# Altium PCB KAVE_F2.PcbDoc
Units mm, origin at the board's own origin, x right, y up, seen from the top; angles counter-clockwise.
Board outline 46.33 x 77.19 mm, 2 copper layers (Top Layer, Bottom Layer); 36 components, 17 nets, 89 pads, 134 vias.
Unrouted connection lines stored in the file: 5.
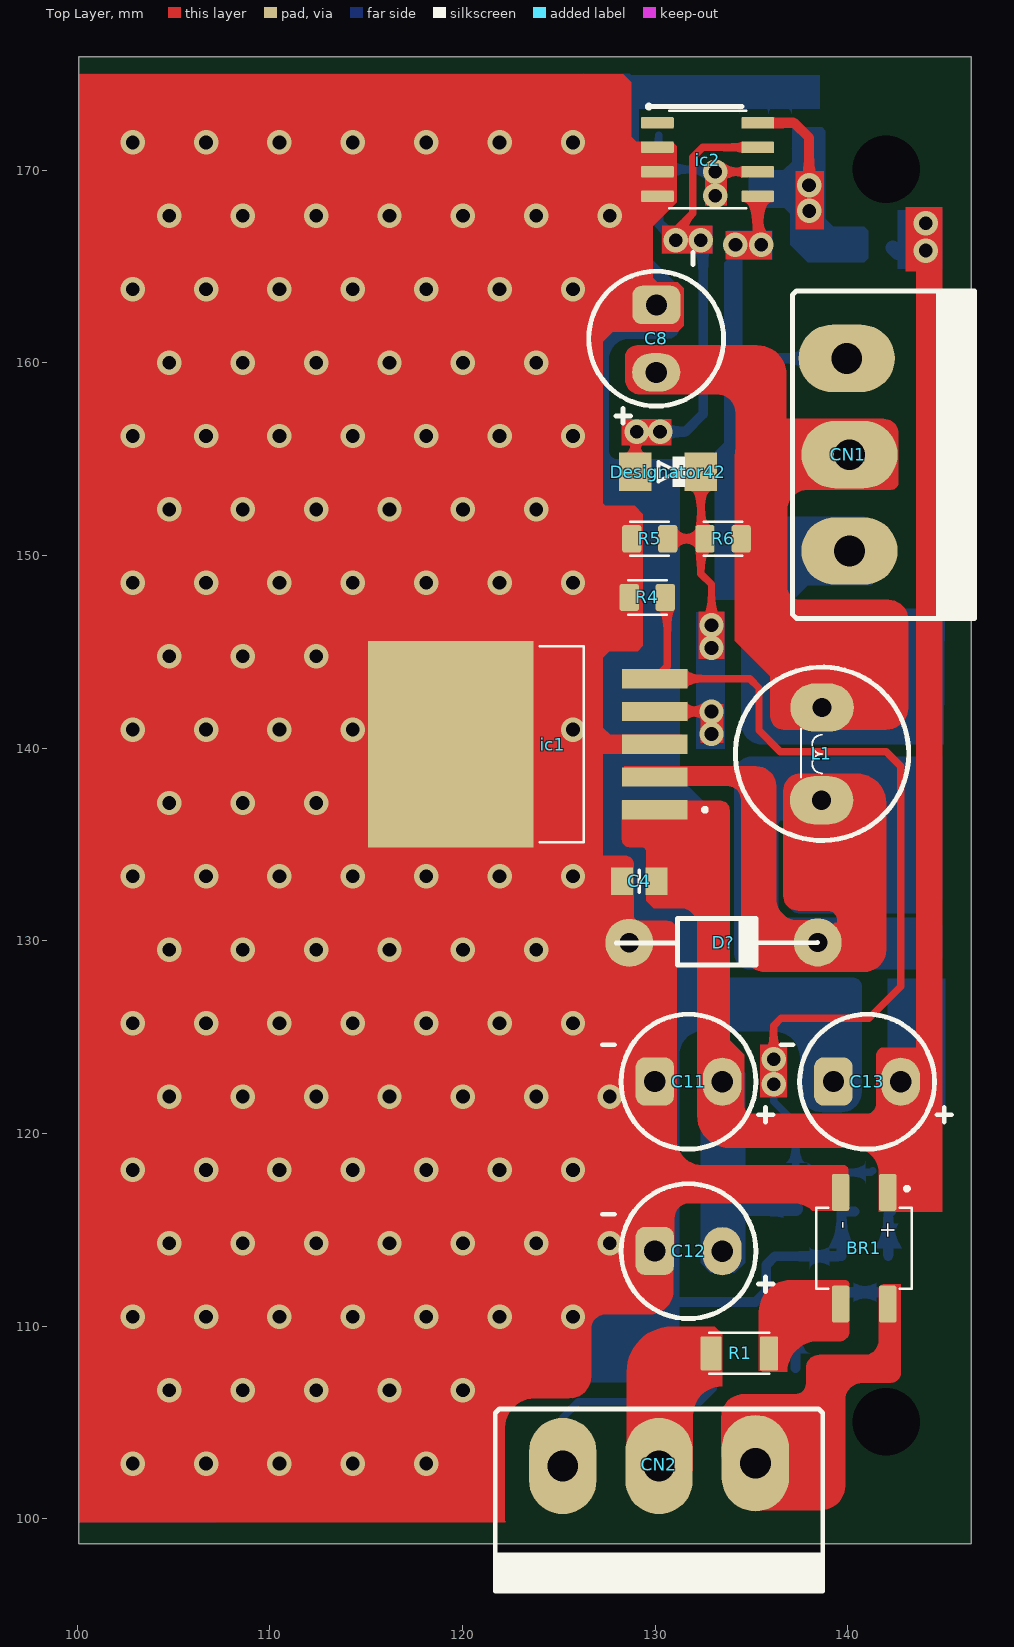
[diagram p0: Top Layer view]
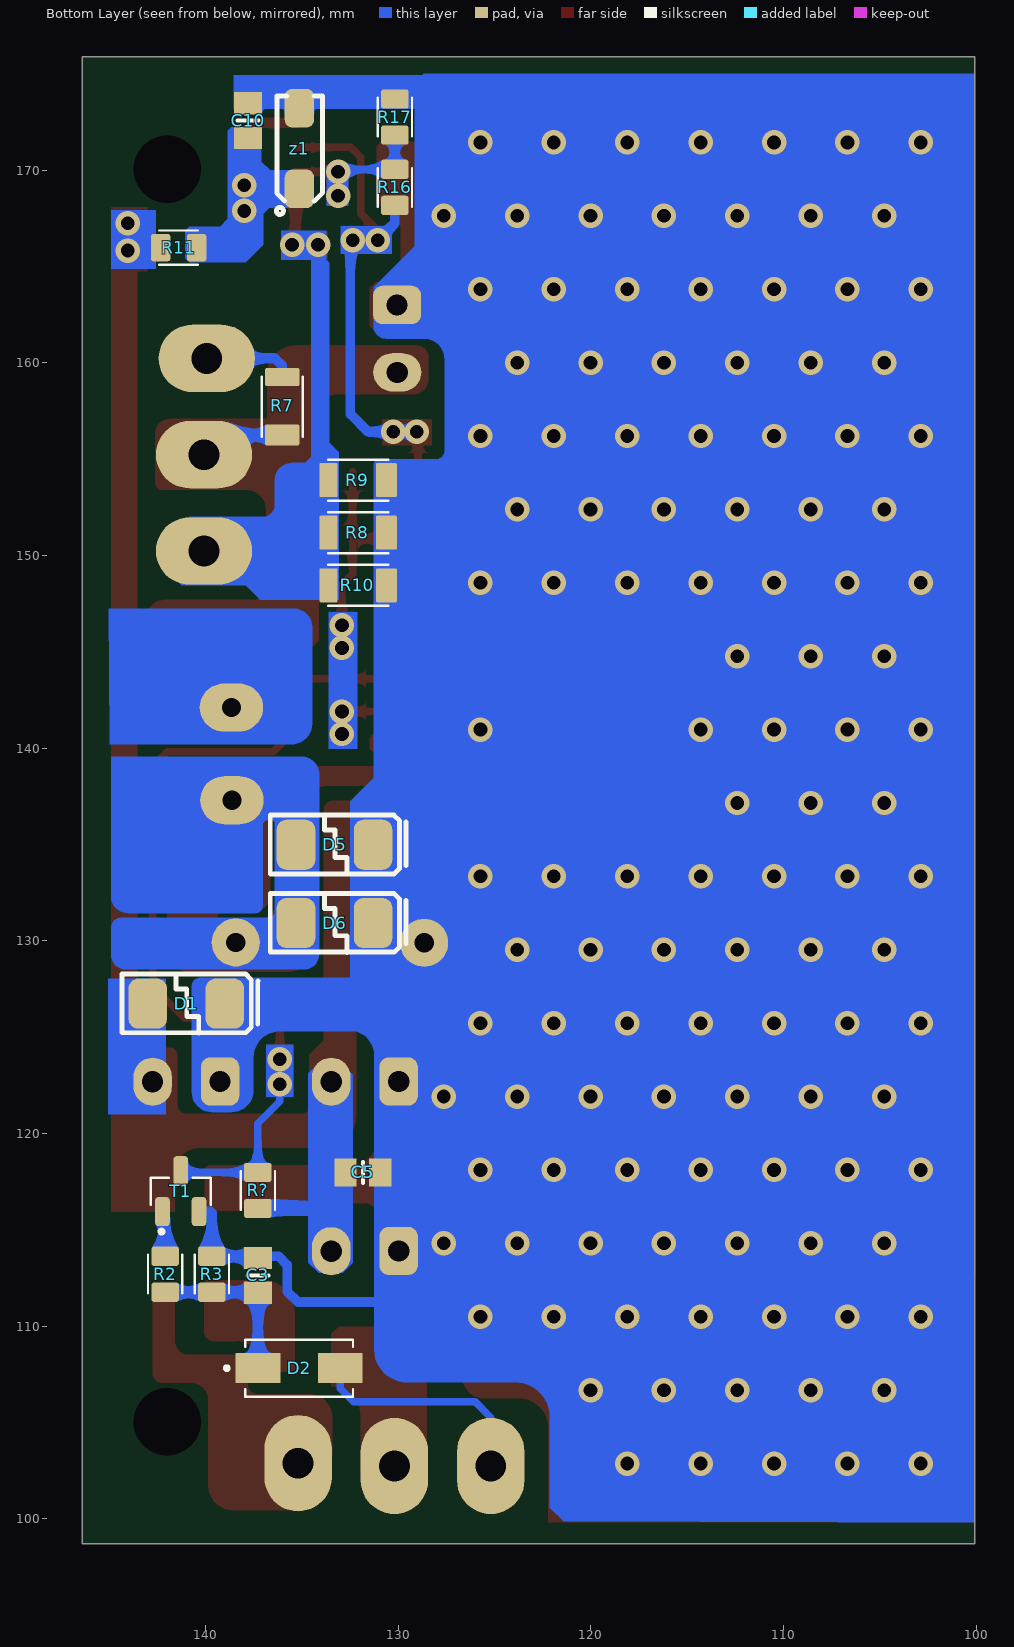
[diagram p1: Bottom Layer view, seen from below]
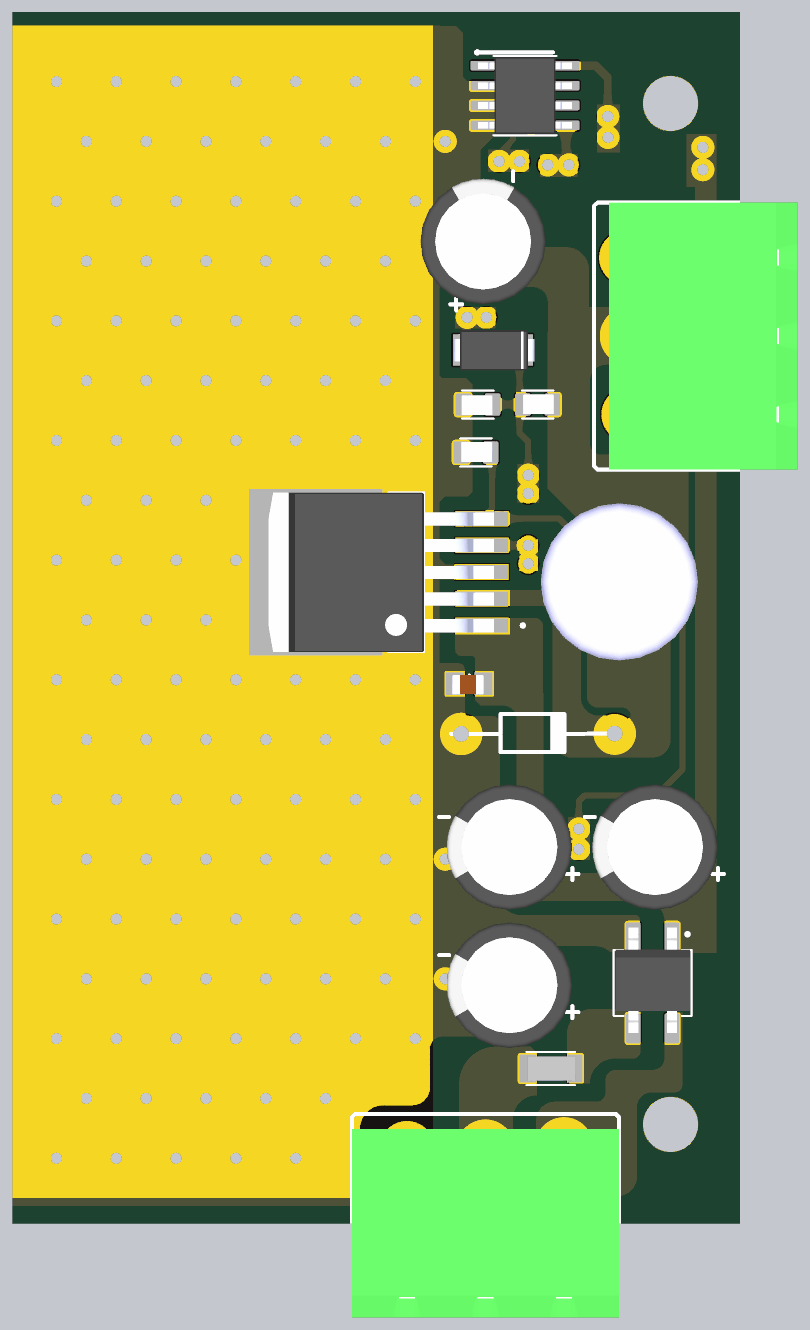
[diagram p2: 3D render of the assembled board from above, using the file's embedded part models]
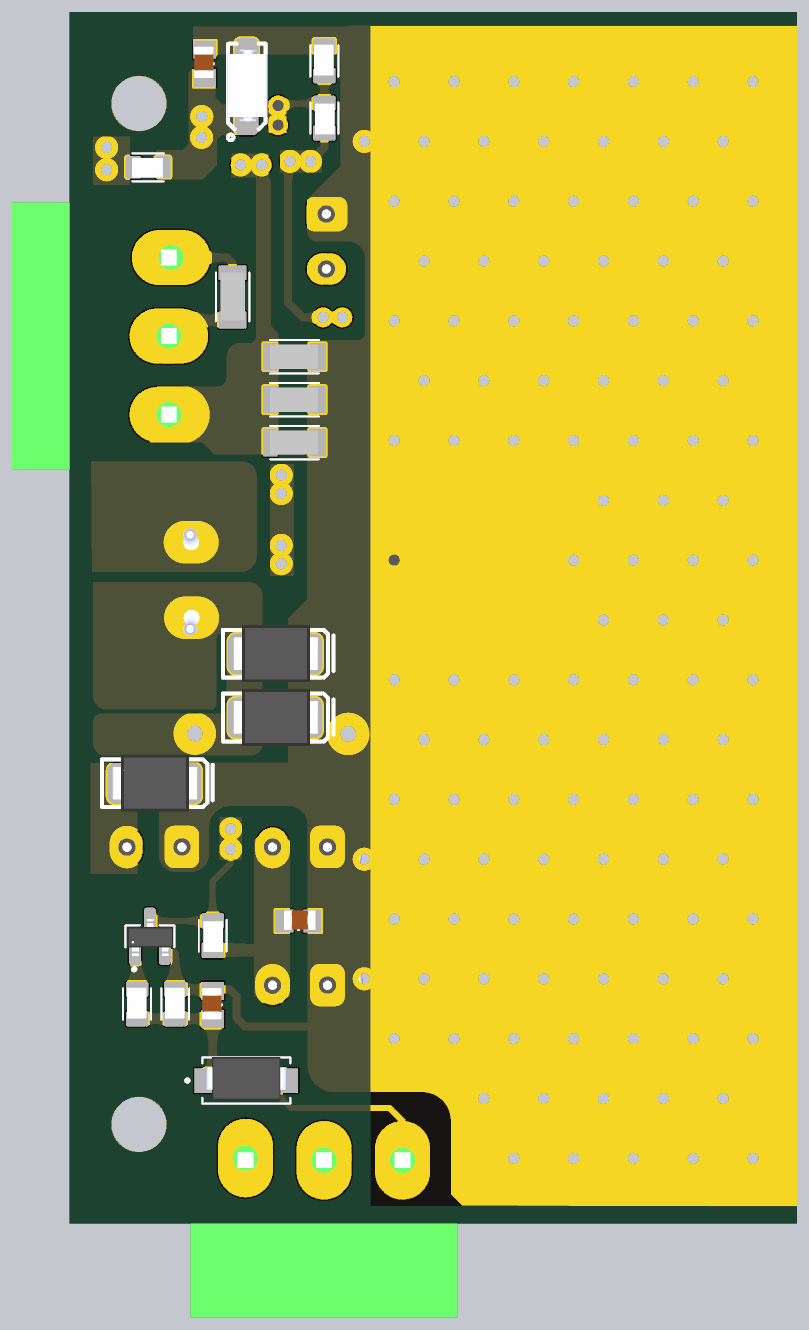
[diagram p3: 3D render of the assembled board from below, using the file's embedded part models]

## Layer stack, top to bottom
Top Solder: solder mask 0.0102, Solder Resist, Dk 3.5
Top Layer: signal copper 0.0356
Dielectric 1: dielectric 0.32, FR-4, Dk 4.8
Bottom Layer: signal copper 0.0356
Bottom Solder: solder mask 0.0102, Solder Resist, Dk 3.5

## Board outline
100.076,98.704 100.076,175.895 146.406,175.895 146.406,98.704

## Design rules (kind name [scope] priority, off if disabled: settings)
Clearance POLY [InNamedPolygon('PG')] p1: gap=1.27 ignorepadtopadclearanceinfootprint=FALSE
Clearance Clearance_1 [All] p2: gap=0.254 ignorepadtopadclearanceinfootprint=FALSE except(0: Arc-Hole Track-Hole SMDPad-Hole THPad-Hole Via-Hole Fill-Hole Poly-Hole Region-Hole Text-Hole)
ComponentClearance [All] p1: gap=0 collisioncheckmode=3 verticalgap=0 showdistances=FALSE
PolygonConnect [All] p1: connectstyle=Direct reliefconductorwidth=0.254 reliefentries=4 polygonreliefangle="90 Angle" airgapwidth=0.254
RoutingVias [All] p1: holewidth=0.711 width=1.27 viastyle="Through Hole" minholewidth=0.711 minwidth=1.27 maxholewidth=0.711 maxwidth=1.27
SolderMaskExpansion [All] p1: expansion=0.102
Width [All] p1: maxlimit=5 minlimit=0.254 preferedwidth=0.254 minimp=50.000000 maximp=50.000000 favimp=50.000000
29 further rules are at their usual default settings.

## Classes and differential pairs
component class U_LED_EN_Kian_V2_SWITCHING: BR1 C3 C4 C5 C8 C10 D1 D2 D? ic1 ic2 L1 R1 R2 R3 R4 R5 R6 R7 R8 R9 R16 R17 R? T1 z1
component class U_LED_EN_Kian_V2_CONECTOR: CN1 CN2

## Components (designator, comment, footprint, x,y, rotation, side; value= is the part's Value field where it differs from the comment)
BR1 "mb6s" MB6S/SMD 140.208,114.046 r90 top
C3 "1UF" CAP-0805 137.265,113.563 r270 bottom
C4 "100nF" CAP-0805 128.245,133.118 r0 top
C5 "100nF" CAP-0805 130.906,117.961 r0 bottom
C8 "1000uF-10V" CAP-EL-P3.5MM 130.048,163.012 r270 top
C10 "100nF" CAP-0805 137.773,173.507 r270 bottom
C11 "1000uF-10V" CAP-EL-P3.5MM 129.977,122.692 r0 top (schematic designator C8)
C12 "1000uF-10V" CAP-EL-P3.5MM 129.977,113.894 r0 top (schematic designator C8)
C13 "1000uF-10V" CAP-EL-P3.5MM 139.248,122.692 r0 top (schematic designator C8)
CN1 "LED_OUT" CONECTOR/FONIX/3PIN 140.081,150.241 r90 top
CN2 "INPUT-24-S" CONECTOR/FONIX/3PIN 125.196,102.743 r0 top
D1 "40V" TVS-5V-SMD 143.002,126.746 r180 bottom
D2 "M7" DIOD/1N4007/SMD 137.306,107.823 r180 bottom
D5 "40V" TVS-5V-SMD 135.306,134.993 r180 bottom (schematic designator D1)
D6 "40V" TVS-5V-SMD 135.306,130.929 r180 bottom (schematic designator D1)
D? "1N5822" DIOD/1N4007/DIP 138.455,129.9 r180 top
Designator42 "Comment" mini_melf 130.521,154.305 r180 top
ic1 "lm2576" lm2576 123.695,141.351 r180 top
ic2 "LM358" SOP-8 133.096,170.434 r0 top
L1 "100uH" inductor-9*12 138.634,137.313 r90 top
R1 "1.1R" RES/1206 134.366,108.458 r0 top
R2 "4.7K" RES/0805 143.033,113.746 r270 bottom
R3 "100K" RES/0805 140.607,113.746 r270 bottom
R4 "10K" RES/0805 130.634,148.761 r180 top
R5 "10K" RES/0805 128.665,149.943 r0 top
R6 "10K" RES/0805 134.571,151.809 r180 top
R7 "18R" RES/1206 135.89,157.734 r90 bottom
R8 "0.2R" RES/1206 132.08,151.322 r0 bottom
R9 "0.2R" RES/1206 132.08,154.055 r0 bottom
R10 "0.2R" RES/1206 132.08,148.59 r0 bottom (schematic designator R8)
R11 "10K" RES/0805 142.445,165.056 r180 bottom (schematic designator R5)
R16 "10K" RES/0805 129.242,168.07 r90 bottom
R17 "2.2k" RES/0805 131.108,173.814 r270 bottom
R? "10K" RES/0805 136.354,116 r90 bottom
T1 "NPN" SOT23 142.24,115.945 r90 bottom
z1 "12v" DIOD/RS1J 135.234,171.215 r90 bottom

## Footprints (in the part's own frame and the unit in brackets; to place one, negate y for a bottom-side part, rotate by r counter-clockwise, add the part's x,y. Pads: shape width x height; smd on the part's side, far side on the other; paste and mask are expansions set on the pad)
CAP-0805 [mm]
  rect 1.15x1.45 smd: 1(0.025,-0.022) 2(1.825,-0.022)
  silkscreen extent 0.93,-0.57 0.93,0.53, body extent -0.17,-0.71 1.84,0.54, height 0.94
CAP-EL-P3.5MM [mm]
  oval 2x2.5 hole 1.1: +(3.5,0)
  rrect50% 2x2.5 hole 1.1: -(0,0.01)
  silkscreen extent -2.73,-3.5 6.13,3.5, body extent -2.25,-4 5.75,4, height 11.5
CONECTOR/FONIX/3PIN [mm]
  oval 3.5x5 hole 1.6: 1(0,0) 2(5,0) 3(10,0.144)
  silkscreen extent -3.5,-6.5 13.5,2.96, body extent -3.5,-10 13.5,2, height 8.8
DIOD/1N4007/DIP [mm]
  round 2.5 hole 1: A(9.8,0) K(0.025,-0.021)
  silkscreen extent 0.02,-1.26 10.46,1.15
DIOD/1N4007/SMD [mm]
  rect 2.33x1.56 smd: A(4.299,0) K(0.019,0)
  silkscreen extent -1.7,-1.48 4.96,1.48, body extent -0.44,-1.24 4.76,1.49, height 2.6
DIOD/RS1J [mm]
  rrect50% 2x1.524 smd: A(2.013,-0.106) K(-2.178,-0.106)
  silkscreen extent -3.5,-1.31 2.65,1.09, body extent -2.32,-1.44 2.28,1.16, height 2.1
inductor-9*12 [mm]
  oval 2.5x3.3 hole 1: 1(-0.01,0) 2(4.8,-0.025)
  silkscreen extent -2.1,-4.53 6.9,4.47, body extent -2.73,-5.09 7.27,4.91, height 12
lm2576 [mm]
  rect 3.4x1 smd paste-3 mask+0: 1(-6.282,4.543) 2(-6.282,2.843) 3(-6.282,1.143) 4(-6.282,-0.557) 5(-6.282,-2.257)
  rect 8.6x10.7 smd paste-6 mask+0: 6(4.318,1.143)
  silkscreen extent -8.98,-3.94 -0.3,6.22, body extent -7.04,-3.92 7.31,6.24, height 4.65
MB6S/SMD [mm]
  rrect23% 1.91x0.91 smd: +(2.9,-1.86) -(2.9,0.59) F(-2.9,0.59) N(-2.9,-1.86)
  silkscreen extent -2.1,-3.12 3.2,1.85, body extent -3.19,-3 3.51,1.72, height 2.9
mini_melf [mm]
  rect 1.7x2 smd: A(1.557,-0.049) K(-1.843,-0.049)
  silkscreen extent -1.01,-0.84 0.36,0.74, body extent -2.79,-1.31 2.35,1.25, height 2.5
RES/0805 [mm]
  rrect25% 1x1.42 smd: 1(0.113,0.933) 2(1.983,0.933)
  silkscreen extent 0.05,0.04 2.05,1.82, body extent 0,0.28 2,1.53, height 0.6
RES/1206 [mm]
  rrect14% 1.09x1.77 smd: 1(-1.469,0.131)
  rrect14% 0.94x1.77 smd: 2(1.536,0.131)
  silkscreen extent -1.55,-0.93 1.55,1.2, body extent -1.51,-0.64 1.59,0.91, height 0.55
SOP-8 [mm]
  rrect25% 1.71x0.61 smd: 1(-2.986,2.032) 2(-2.986,0.762) 3(-2.986,-0.508) 4(-2.986,-1.778) 5(2.224,-1.778) 6(2.224,-0.508) 7(2.224,0.762) 8(2.224,2.032)
  silkscreen extent -3.53,-2.4 1.62,2.98, body extent -3.38,-2.32 2.62,2.58, height 1.75
SOT23 [mil]
  rrect50% 60x30 smd: 1(0.24,0) 2(0.24,-74.8) 3(83.7,-37.4)
  silkscreen extent -45,-99 70,24, body extent -7,-96 86,19, height 44
TVS-5V-SMD [mm]
  rrect50% 2x2.6 smd: 1(4,0) 2(0,0)
  silkscreen extent -1.33,-1.53 5.72,1.54, body extent -0.66,-1.79 4.74,1.83, height 2.43

## Part data
BR1: library part "BRIDGE RECTIFIERS/SMD"
C3 C4 C5 C10: library part cap_smd
C8 C11 C12 C13: library part cap-electrolit
CN1 CN2: library part CONECTOR/FONIX/3PIN
D1 D5 D6: library part TVS-SMD
D2 D?: library part DIOD/RECTIFIERS
L1: library part inductor
R1 R2 R3 R4 R5 R6 R7 R8 R9 R10 R11 R16 R17 R?: library part RES/SMD
z1: library part zener-0.5w

## Free pads (board coordinates)
  round 1.524 hole 3.5: 13(141.986,105.029) 13(141.986,170.053)

## Via types
v1: diameter 1.27, hole 0.711, Top Layer to Bottom Layer, 134 vias

## Nets (pads, with @x,y where several pads share a name; then routed paths per layer and width w, separated by ;. In a path a pad name is that pad's centre, name@x,y a point inside that pad or via, vN(x,y) a via of type N, cw(c..) or ccw(c..) an arc to the next point about the centre after c; other vN are vias at no path point)
+12: C10.2 ic2.8 R11.2 z1.K | length 15.6
  Top Layer w0.508: ic2.8 137.215,172.466 137.986,171.696 v1(137.986,169.227)
  Bottom Layer w0.508: z1.K 137.287,169.037 ; C10.2 137.795,166.624 138.43,165.989 R11.2
  other v1: 137.998,167.894
+24: BR1.+ C4.2 C5.2 C11.+ C12.+ C13.+ D1.2 ic1.1 R11.1 R?.1 | length 58.2
  Top Layer w0.762: C13.+ 144.145,124.089 144.145,165.735 v1(144.043,165.837)
  Bottom Layer w0.762: C11.+@133.477,122.682 133.604,122.555 133.604,116.205 ; C12.+@133.604,114.046 133.604,116.205 ; R?.1 133.696,116.113 133.604,116.205 ; R11.1 142.586,165.735 142.688,165.837 v1(144.043,165.837) ; C13.+ C13.+@142.875,122.819
  other v1: 144.043,167.259
+LED_G: CN1.3 R7.2 | length 4.7
  Bottom Layer w0.508: R7.2 136.021,159.871 136.39,160.241 CN1.3
+LED_OUT: C8.+ CN1.2 L1.2 R6.1 R7.1 | length 4.5
  Bottom Layer w0.508: R7.1 139.057,156.265 CN1.2
-LED_OUT: CN1.1 ic2.5 R8.2 R9.2 R10.2 | length 15
  Top Layer w0.508: ic2.5 135.32,166.257 135.436,166.141 v1(135.509,166.141)
  Bottom Layer w0.508: R9.2 134.163,154.47 v1@134.163,166.091
  other v1: 134.163,166.141
AC1: CN2.2 R1.1
AC2: BR1.N CN2.3
EN: ic1.5 R4.1 R?.2 T1.3 | length 51.4
  Top Layer w0.381: R4.1@130.626,147.828 130.626,144.257 ic1.5 134.903,143.608 135.382,143.129 135.382,140.931 136.486,139.827 141.986,139.827 142.748,139.065 142.748,127.635 141.097,125.984 136.525,125.984 136.144,125.603 v1(136.144,122.555)
  Bottom Layer w0.381: v1(136.144,122.555) 136.144,121.666 137.287,120.523 R?.2 141.202,117.983 T1.3
  other v1: 136.144,123.85
GND: BR1.- C3.1 C4.1 C5.1 C8.- C10.1 C11.- C12.- C13.- D1.1 D5.1 D6.1 D?.A ic1.3 ic1.6 ic2.2 ic2.3 ic2.4 R3.1 R4.2 R5.1 R8.1 R9.1 R10.1 R17.1 T1.2 z1.A | length 40.5
  Top Layer w0.508: 125.603,140.208 ic1.3 ; 125.73,147.828 R4.2 128.778,147.955 R5.1
  Bottom Layer w0.508: C12.-@129.977,114.386 129.977,112.263 130.988,111.252 135.204,111.252 135.763,111.811 135.763,113.182 136.214,113.633 R3.1 139.673,115.874 139.751,115.951 T1.2 ; R17.1 137.576,173.701 C10.1 ; R10.1 R8.1 R9.1
  other v1: 102.87,102.87 106.68,102.87 110.49,102.87 114.3,102.87 118.11,102.87 104.775,106.68 108.585,106.68 112.395,106.68 116.205,106.68 120.015,106.68 102.87,110.49 106.68,110.49 110.49,110.49 114.3,110.49 118.11,110.49 121.92,110.49 125.73,110.49 104.775,114.3 108.585,114.3 112.395,114.3 116.205,114.3 120.015,114.3 123.825,114.3 127.635,114.3 102.87,118.11 106.68,118.11 110.49,118.11 114.3,118.11 118.11,118.11 121.92,118.11 125.73,118.11 104.775,121.92 108.585,121.92 112.395,121.92 116.205,121.92 120.015,121.92 123.825,121.92 127.635,121.92 102.87,125.73 106.68,125.73 110.49,125.73 114.3,125.73 118.11,125.73 121.92,125.73 125.73,125.73 104.775,129.54 108.585,129.54 112.395,129.54 116.205,129.54 120.015,129.54 123.825,129.54 102.87,133.35 106.68,133.35 110.49,133.35 114.3,133.35 118.11,133.35 121.92,133.35 125.73,133.35 104.775,137.16 108.585,137.16 112.395,137.16 102.87,140.97 106.68,140.97 110.49,140.97 114.3,140.97 125.73,140.97 104.775,144.78 108.585,144.78 112.395,144.78 102.87,148.59 106.68,148.59 110.49,148.59 114.3,148.59 118.11,148.59 121.92,148.59 125.73,148.59 104.775,152.4 108.585,152.4 112.395,152.4 116.205,152.4 120.015,152.4 123.825,152.4 102.87,156.21 106.68,156.21 110.49,156.21 114.3,156.21 118.11,156.21 121.92,156.21 125.73,156.21 104.775,160.02 108.585,160.02 112.395,160.02 116.205,160.02 120.015,160.02 123.825,160.02 102.87,163.83 106.68,163.83 110.49,163.83 114.3,163.83 118.11,163.83 121.92,163.83 125.73,163.83 104.775,167.64 108.585,167.64 112.395,167.64 116.205,167.64 120.015,167.64 123.825,167.64 127.635,167.64 102.87,171.45 106.68,171.45 110.49,171.45 114.3,171.45 118.11,171.45 121.92,171.45 125.73,171.45
Ic_fb: Designator42.K ic1.4 R5.2 R6.2 | length 17.3
  Top Layer w0.381: ic1.4 v1(132.92,141.908) ; R5.2 R6.2@132.364,150.876 ; Designator42.K R6.2@132.364,150.876 ; v1(132.92,145.21) 132.92,148.512 132.364,149.068 R6.2@132.364,150.876
  Bottom Layer w0.381: v1(132.92,141.908) v1(132.92,145.21)
  other v1: 132.92,140.741 132.92,146.38
IF: Designator42.A ic2.7 R16.1 | length 26.2
  Top Layer w0.381: Designator42.A 128.964,156.364 v1(129.032,156.432) ; v1(131.064,166.37) 131.064,166.878 131.953,167.767 131.953,170.688 132.461,171.196 ic2.7
  Bottom Layer w0.508: v1(129.032,156.432) 131.566,156.432 132.486,157.353 132.486,166.04 v1@131.369,166.04 ; R16.1 130.175,167.259 v1(131.064,166.37)
  other v1: 130.251,156.432 132.364,166.37
NetBR1_F: BR1.F R1.2
NetC3_2: C3.2 D2.K R2.2 R3.2 | length 8.7
  Bottom Layer w0.508: D2.K C3.2 137.312,111.763 R3.2 R2.2
NetD3_K: D5.2 D6.2 D?.K ic1.2 L1.1 | length 6.6
  Top Layer w0.762: L1.1@138.262,137.033 138.43,137.201 L1.1@138.659,137.43 ; D?.K@138.43,129.413 D?.K@138.43,130.683
  Bottom Layer w0.762: D6.2@135.255,130.937 135.382,131.064 D5.2@135.382,135.001 ; L1.1@138.659,136.754 L1.1@138.659,137.43
Netic2_6: ic2.6 R16.2 R17.2 | length 7.2
  Top Layer w0.381: v1(133.121,169.926) ic2.6
  Bottom Layer w0.381: R17.2 R16.2 133.223,170.053 133.121,169.951 v1(133.121,169.926)
  other v1: 133.121,168.681
NetR2_1: R2.1 T1.1 | length 2.4
  Bottom Layer w0.508: R2.1 142.1,115.811 T1.1
SIGNAL: CN2.1 D2.A | length 12
  Bottom Layer w0.381: CN2.1 125.196,105.257 126.009,106.07 132.309,106.07 133.007,106.769 D2.A
pads on no net: ic2.1

## Other copper
Top Layer:
  rectangle net +24: 132.182,121.463 133.883,132.486
  rectangle net EN: 135.445,121.869 136.852,124.612
  rectangle net IF: 128.245,155.727 130.835,157.099
  rectangle net Ic_fb: 132.356,140.267 133.544,142.289
  rectangle net Ic_fb: 132.232,144.628 133.604,147.091
  rectangle net IF: 130.353,165.684 132.969,167.132
  rectangle net -LED_OUT: 133.656,165.379 136.068,166.853
  rectangle net Netic2_6: 132.588,168.173 133.731,170.284
  rectangle net +12: 137.287,166.929 138.76,169.977
  rectangle net +24: 143.002,164.744 144.907,168.097
  rectangle net +24: 143.535,123.952 144.907,168.097
  rectangle net GND: 100.025,112.497 127.279,175.006
  region net AC2: 133.426,103.2 133.426,105.283 cw(c134.62,105.283) 134.62,106.477 137.287,106.477 ccw(c137.287,107.018) 137.828,107.018 137.828,107.831 cw(c138.506,107.831) 138.506,108.509 140.852,108.509 ccw(c140.852,109.259) 141.602,109.259 141.602,111.935 cw(c141.834,111.935) 141.834,112.166 142.748,112.166 142.748,107.569 cw(c142.24,107.569) 142.24,107.061 140.767,107.061 ccw(c140.767,106.147) 139.852,106.147 139.852,101.727 cw(c138.582,101.727) 138.582,100.457 134.899,100.457
  region net GND: 129.004,110.617 127.432,110.617 ccw(c127.432,109.855) 126.67,109.855 126.67,107.391 cw(c125.527,107.391) 125.527,106.248 123.723,106.248 ccw(c123.723,104.724) 122.199,104.724 122.199,99.898 122.25,99.847 122.225,99.822 100.076,99.822 100.076,115.951 101.905,117.78 103.395,116.29 128.651,116.29
  region net GND: 126.263,175.006 126.289,174.981 128.346,174.981 128.753,174.574 128.753,171.738 129.015,171.475 130.886,171.475 131.115,171.247 131.115,168.351 129.87,167.107 129.87,164.414 130.099,164.186 131.166,164.186 131.47,163.881 131.47,161.925 131.166,161.62 127.792,161.62 126.822,160.65 127.051,160.422 127.051,152.933 127.406,152.578 128.93,152.578 129.362,152.146 129.362,145.313 129.083,145.034 127.61,145.034 127.279,144.704 127.279,141.072 127.66,140.691 131.343,140.691 131.475,140.559 131.475,139.976 131.225,139.725 127.127,139.725 126.822,139.421
  region net GND: 127.279,175.006
  region net GND: 130.912,113.563 130.988,113.64 130.988,115.595 cw(c131.775,115.595) 131.775,116.383 137.185,116.383 cw(c137.185,114.986) 138.144,116.002 140.03,116.002 140.03,118.101 ccw(c139.767,118.101) 139.767,118.364 132.428,118.364 cw(c132.428,119.677) 131.115,119.677 131.115,130.549 ccw(c130.625,130.549) 130.625,131.039 129.159,131.039 cw(c129.159,131.318) 128.88,131.318 128.88,133.985 ccw(c128.448,133.985) 128.448,134.417 127.102,134.417 126.314,133.629 126.314,111.252 126.949,110.617 129.718,110.617 ccw(c129.718,111.836) 130.937,111.836 130.937,113.767
  region: 123.927,174.93
  region net +LED_OUT: 134.17,155.528 134.17,157.396 ccw(c133.197,157.396) 133.197,158.369 129.218,158.369 cw(c129.218,159.152) 128.435,159.152 128.435,160.312 cw(c129.032,160.312) 129.032,160.909 135.305,160.909 cw(c135.306,159.413) 136.802,159.413 136.802,156.923 136.88,156.845 138.938,156.845
  region net +LED_OUT: 136.658,140.97 cw(c136.658,141.654) 135.973,141.654 135.973,143.731 134.133,145.571 134.133,155.147 cw(c136.085,155.147) 136.085,157.099 141.859,157.099 cw(c141.859,156.337) 142.621,156.337 142.621,153.797 cw(c142.24,153.797) 142.24,153.416 137.9,153.416 ccw(c137.9,152.366) 136.85,152.366 136.85,148.392 ccw(c137.541,148.392) 137.541,147.701 142.113,147.701 cw(c142.113,146.685) 143.129,146.685 143.129,142.113 cw(c141.986,142.113) 141.986,140.97
  region net NetD3_K: 138.684,138.684 137.541,138.684 ccw(c137.541,137.795) 136.652,137.795 136.652,132.334 ccw(c137.414,132.334) 137.414,131.572 138.938,131.572 cw(c138.938,131.064) 139.446,131.064 139.446,130.937 139.319,130.937 138.43,130.048 138.43,128.905 138.938,128.397 140.843,128.397 ccw(c140.843,129.54) 141.986,129.54 141.986,137.16 ccw(c140.462,137.16) 140.462,138.684
  region net NetD3_K: 128.397,139.065 135.255,139.065 cw(c135.255,138.049) 136.271,138.049 136.271,132.207 ccw(c137.414,132.207) 137.414,131.064 138.557,131.064 139.446,130.175 138.938,129.667 138.938,128.397 135.704,128.397 cw(c135.704,129.643) 134.458,129.643 134.458,137.322 ccw(c133.731,137.322) 133.731,138.049 128.397,138.049
  region net +24: 128.27,137.287 128.27,135.255 ccw(c128.651,135.255) 128.651,134.874 129.286,134.874 cw(c129.286,134.62) 129.54,134.62 129.54,132.08 129.921,131.699 131.318,131.699 cw(c131.318,130.835) 132.182,130.835 132.182,120.929 ccw(c133.858,120.929) 133.858,119.253 140.31,119.253 cw(c140.31,117.958) 141.605,117.958 141.605,115.951 144.907,115.951 144.907,123.952 ccw(c144.399,123.952) 144.399,124.46 141.859,124.46 ccw(c141.859,124.079) 141.478,124.079 141.478,121.539 cw(c140.97,121.539) 140.97,121.031 135.001,121.031 cw(c135.001,121.412) 134.62,121.412 134.62,124.079 133.858,124.841 133.858,136.779 ccw(c133.35,136.779) 133.35,137.287
  region net NetBR1_F: 135.509,107.696 135.565,107.64 136.85,107.64 cw(c138.43,107.64) 138.43,109.22 139.573,109.22 ccw(c139.573,109.728) 140.081,109.728 140.081,112.141 ccw(c139.827,112.141) 139.827,112.395 137.033,112.395 ccw(c137.033,110.744) 135.382,110.744 135.382,107.696
  region net AC1: 131.953,102.489 131.953,105.355 cw(c133.477,105.355) 133.477,106.879 133.477,109.601 133.096,109.982 130.866,109.982 ccw(c130.866,107.64) 128.524,107.64 128.524,101.985 128.655,101.854
Bottom Layer:
  rectangle net GND: 128.499,173.177 138.557,174.955
  rectangle net EN: 135.433,121.895 136.855,124.612
  rectangle net Ic_fb: 132.105,139.954 133.629,147.085
  rectangle net -LED_OUT: 133.731,165.354 136.093,166.878
  rectangle net IF: 130.327,165.659 132.994,167.107
  rectangle net Netic2_6: 132.588,168.161 133.731,170.256
  rectangle net +24: 142.57,164.871 144.907,167.945
  rectangle net +24: 142.062,120.98 145.059,128.041
  region net -LED_OUT: 133.731,165.354 133.579,165.202 133.579,155.854 133.096,155.372 133.096,154.61 133.452,154.254 133.528,154.33 134.722,154.33 134.976,154.584 134.976,154.813 134.83,154.813 134.518,155.124 134.518,165.735 134.163,166.091
  region net +12: 137.109,172.237 137.109,170.456 136.655,170.002 135.153,170.002 134.849,169.697 134.849,168.275 134.95,168.275 135.179,168.046 136.703,168.046 137.008,167.742 137.008,166.141 137.922,165.227 140.843,165.227 141.046,165.43 141.046,166.878 140.843,167.081 139.243,167.081 138.836,167.488 138.836,172.06 138.659,172.237
  region net +24: 133.782,123.774 133.426,123.419 132.715,123.419 132.359,123.063 132.359,113.284 132.867,112.776 134.137,112.776 134.661,113.299 134.661,123.124 134.188,123.596
  region net GND: 131.547,125.298 136.169,125.298 cw(c136.169,123.952) 137.516,123.952 137.516,122.25 ccw(c138.659,122.25) 138.659,121.107 139.675,121.107 ccw(c139.675,122.149) 140.716,122.149 140.716,127.635 ccw(c140.259,127.635) 140.259,128.092 130.494,128.092 130.036,127.635
  region net GND: 100.076,99.797 100.076,175.006 128.676,175.006 129.134,174.549 129.134,166.065 131.267,163.932 131.267,161.874 cw(c130.658,161.874) 130.658,161.265 128.676,161.265 ccw(c128.676,160.172) 127.584,160.172 127.584,155.473 ccw(c128.067,155.473) 128.067,154.991 131.004,154.991 cw(c131.004,154.728) 131.267,154.728 131.267,138.481 132.486,137.262 132.486,125.324 ccw(c132.486,124.079) 131.242,124.079 131.242,108.788 cw(c129.54,108.788) 129.54,107.086 123.927,107.086 ccw(c123.927,105.283) 122.123,105.283 122.123,100.584 121.412,99.873
  region net +LED_OUT: 145.035,147.242 135.407,147.244 ccw(c135.407,146.304) 134.468,146.304 134.468,141.275 ccw(c135.534,141.275) 135.534,140.208 144.628,140.208 144.983,140.208 144.983,140.564
  region net -LED_OUT: 133.096,154.813 135.509,154.813 cw(c135.509,153.924) 136.398,153.924 136.398,152.654 ccw(c137.033,152.654) 137.033,152.019 140.843,152.019 141.478,151.384 141.478,148.717 141.224,148.463 137.922,148.463 137.16,147.701 133.096,147.701
  region net NetD3_K: 144.907,139.573 144.907,132.334 cw(c144.018,132.334) 144.018,131.445 137.414,131.445 cw(c137.414,131.826) 137.033,131.826 137.033,136.017 ccw(c136.779,136.017) 136.779,136.271 136.576,136.271 ccw(c136.576,136.093) 136.398,136.093 136.398,135.414 136.398,135.255 136.398,135.096 136.398,131.572 ccw(c136.779,131.572) 136.779,131.191 144.399,131.191 cw(c144.399,130.683) 144.907,130.683 144.907,129.286 cw(c144.145,129.286) 144.145,128.524 134.874,128.524 cw(c134.874,129.286) 134.112,129.286 134.112,138.684 cw(c135.001,138.684) 135.001,139.573

## Silkscreen, mask and mechanical layers (free items; w line width, h text height)
Top Solder:
  rectangle: 100.051,100.33 126.848,175.006
  region: 100.051,175.006
Bottom Solder:
  rectangle: 100,99.822 127.229,174.981
Mechanical 1:
  the board outline again, w0.254

## Text inside footprints (layer, text, board x,y; h text height)
BR1: Top Overlay "+" at 141.733,115.445 h0.81 r270; Top Overlay "-" at 139.443,115.446 h0.81 r270